# EAGLE board facetHound_inputs (EAGLE 9.6.2)
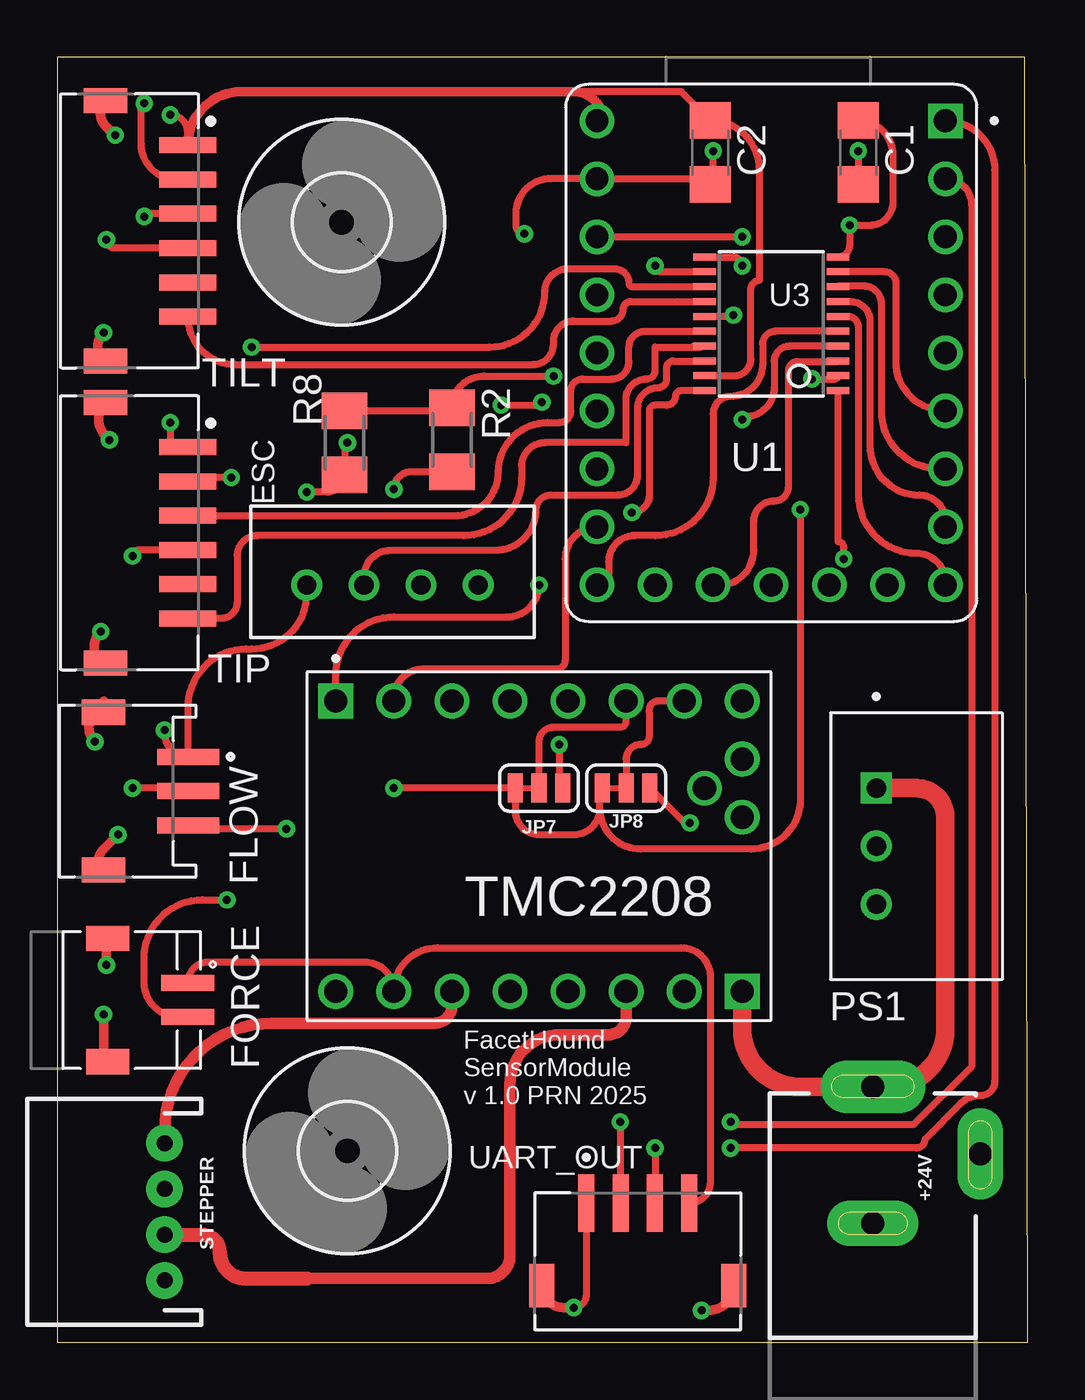
[diagram p0: board, top side]
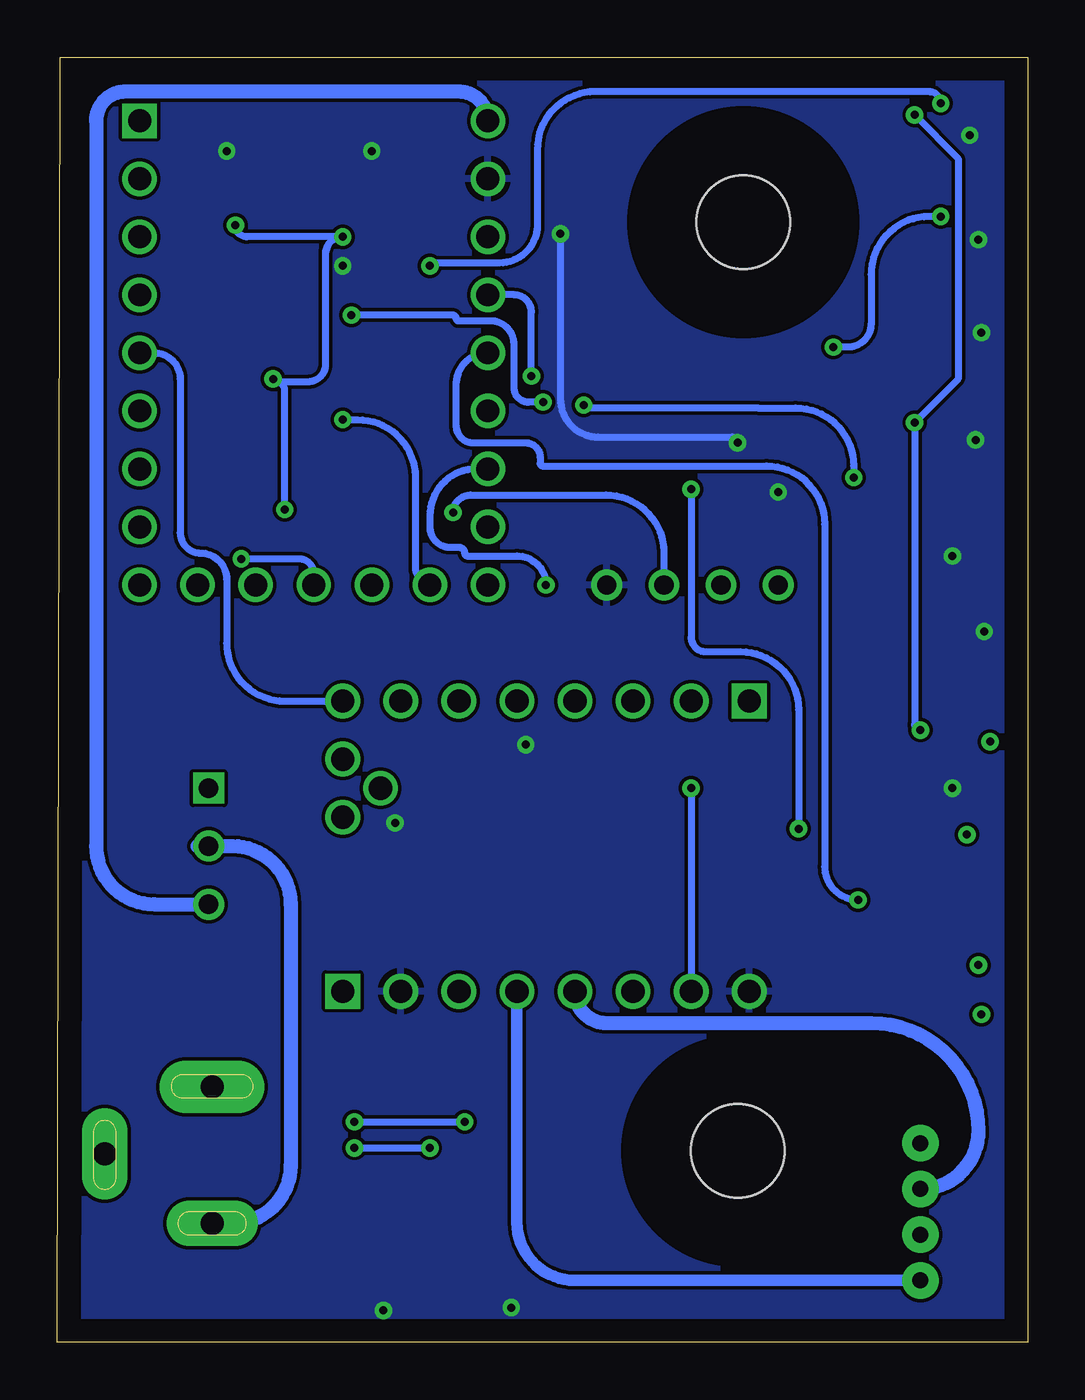
[diagram p1: board, bottom side, seen from below]

Size 42.47 x 56.25 mm. Coordinates in mm from the lower left corner, seen from the top.
Outline: 0,0 42.47,0 42.34,56.25 0,56.25 0,0
Copper layers (1*16): Top 0.035mm / dielectric 1.5mm / Bottom 0.035mm
Design rules "default": minimum track width 6mil, minimum drill 0.35mm, track to track 6mil, track to pad 6mil, pad to pad 6mil, via to via 6mil, smd to smd 6mil, copper to edge 40mil, drill to drill 6mil, minimum pad ring 10mil, minimum via ring 8mil, stop-mask expansion 4mil, vias tented up to drill 0mil, thermal gap 10mil

## Footprints (pad centres in the part's own frame; a part is rotated, then mirrored left to right if it is on the bottom)
POWER_JACK_PTH_SLOT = drill 1 pad 2 long: GND 0,0; GNDBREAK -3.048,4.699 | drill 1 pad 2.3 long: PWR -5.969,0
C1206 = smd 1.6 x 1.8: 1 -1.4,0; 2 1.4,0
B4B-XH-A = drill 0.84: 1 0,0; 2 2.5,0; 3 5,0; 4 7.5,0
JST_S3B-ZR-SM4A-TF = smd 0.7 x 2.7: 1 -1.5,3.7; 2 0,3.7; 3 1.5,3.7 | smd 1.1 x 1.9: SH1 -3.45,0; SH2 3.45,0
JST_S2B-ZR-SM4A-TF = smd 0.7 x 2.3: 1 0.75,0; 2 -0.75,0 | smd 1.1 x 1.9: P1 2.7,3.5; P2 -2.7,3.5
4,1 = hole 4.1: 0,0
SMT-JUMPER_3_1-NC_TRACE_SILK = smd 0.66 x 1.27: 1 -1.041,0; 2 0,0; 3 1.041,0
CONV_TSR_1-2450 = drill 0.85 square: 1 -2.54,-1.75 | drill 0.85: 2 0,-1.75; 3 2.54,-1.75
M1206 = smd 1.6 x 2: 1 -1.4,0; 2 1.4,0
JST-4-PTH = drill 0.7 pad 1.6: 1 -3,0; 2 -1,0; 3 1,0; 4 3,0
JST_S6B-ZR-SM4A-TF(LF)(SN) = smd 0.7 x 2.5: 1 -3.75,0; 2 -2.25,0; 3 -0.75,0; 4 0.75,0; 5 2.25,0; 6 3.75,0 | smd 1.1 x 1.9: SH1 -5.7,-3.6; SH2 5.7,-3.6
MODULE_TMC2208_SILENTSTEPSTICK = drill 1.016 square: JP1_1 6.35,8.89; JP2_1 -6.35,-8.89 | drill 1.016: JP1_2 6.35,6.35; JP1_3 6.35,3.81; JP1_4 6.35,1.27; JP1_5 6.35,-1.27; JP1_6 6.35,-3.81; JP1_7 6.35,-6.35; JP1_8 6.35,-8.89; JP2_2 -6.35,-6.35; JP2_3 -6.35,-3.81; JP2_4 -6.35,-1.27; JP2_5 -6.35,1.27; JP2_6 -6.35,3.81; JP2_7 -6.35,6.35; JP2_8 -6.35,8.89; JP3_1 1.27,-8.89; JP3_2 3.81,-8.89; VREF 2.54,-7.239
MODULE_RP2040-ZERO = drill 1 square: 1 7.62,10.16 | drill 1: 2 7.62,7.62; 3 7.62,5.08; 4 7.62,2.54; 5 7.62,0; 6 7.62,-2.54; 7 7.62,-5.08; 8 7.62,-7.62; 9 7.62,-10.16; 10 5.08,-10.16; 11 2.54,-10.16; 12 0,-10.16; 13 -2.54,-10.16; 14 -5.08,-10.16; 15 -7.62,-10.16; 16 -7.62,-7.62; 17 -7.62,-5.08; 18 -7.62,-2.54; 19 -7.62,0; 20 -7.62,2.54; 21 -7.62,5.08; 22 -7.62,7.62; 23 -7.62,10.16
TSSOP20 = smd 0.305 x 0.991: 1 -2.925,-2.918; 2 -2.275,-2.918; 3 -1.625,-2.918; 4 -0.975,-2.918; 5 -0.325,-2.918; 6 0.325,-2.918; 7 0.975,-2.918; 8 1.625,-2.918; 9 2.275,-2.918; 10 2.925,-2.918; 11 2.925,2.918; 12 2.275,2.918; 13 1.625,2.918; 14 0.975,2.918; 15 0.325,2.918; 16 -0.325,2.918; 17 -0.975,2.918; 18 -1.625,2.918; 19 -2.275,2.918; 20 -2.925,2.918
JST_S4B-ZR-SM4A-TF(LF)(SN) = smd 0.7 x 2.5: 1 -2.25,0; 2 -0.75,0; 3 0.75,0; 4 2.25,0 | smd 1.1 x 1.9: S1 -4.2,-3.6; S2 4.2,-3.6

## Placement (x,y rotation side)
+24V  POWER_JACKPOWER_JACK_SLOT  [POWER_JACK_PTH_SLOT]  35.69,5.21 270 top
C1  0.1uF  [C1206]  35.05,52.07 270 top
C2  0.1uF  [C1206]  28.57,52.07 270 top
ESC  B4B-XH-A  [B4B-XH-A]  10.92,33.15 0 top
FLOW  S3B-ZR-SM4A-TF  [JST_S3B-ZR-SM4A-TF]  2.03,24.13 270 top
FORCE  S2B-ZR-SM4A-TF  [JST_S2B-ZR-SM4A-TF]  5.71,14.99 90 top
H1  MOUNT-HOLE4.1  [4,1]  12.45,49.02 0 top
H2  MOUNT-HOLE4.1  [4,1]  12.7,8.38 0 top
JP7  JUMPER-SMT_3_1-NC_TRACE_SILK  [SMT-JUMPER_3_1-NC_TRACE_SILK]  21.08,24.26 180 top
JP8  JUMPER-SMT_3_1-NC_TRACE_SILK  [SMT-JUMPER_3_1-NC_TRACE_SILK]  24.89,24.26 180 top
PS1  TSR_1-2450  [CONV_TSR_1-2450]  37.59,21.72 270 top
R2  10k  [M1206]  17.27,39.5 90 top
R8  10k  [M1206]  12.57,39.37 90 top
STEPPER  [JST-4-PTH]  4.7,5.71 90 top
TILT  S6B-ZR-SM4A-TF(LF)(SN)  [JST_S6B-ZR-SM4A-TF(LF)(SN)]  5.71,48.64 270 top
TIP  S6B-ZR-SM4A-TF(LF)(SN)  [JST_S6B-ZR-SM4A-TF(LF)(SN)]  5.71,35.43 270 top
TMC2208  TMC2208_SILENTSTEPSTICK  [MODULE_TMC2208_SILENTSTEPSTICK]  21.08,21.72 90 top
U1  RP2040-ZERO'  [MODULE_RP2040-ZERO]  31.24,43.31 0 top
U3  [TSSOP20]  31.24,44.58 90 top
UART_OUT  S4B-ZR-SM4A-TF(LF)(SN)  [JST_S4B-ZR-SM4A-TF(LF)(SN)]  25.4,6.1 0 top

## Library data of the parts
+24V = SparkFun-Connectors; PROD_ID: CONN-08197
C1 C2 R2 R8 U3 = adafruit
ESC = Connector; CATEGORY: Header; DATASHEET: https://www.jst-mfg.com/product/pdf/eng/eXH.pdf?67404de0bbae1; DESCRIPTION: Connector Header Through Hole 4 position 0.098" (2.50mm); MANUFACTURER: JST Sales America Inc.; MPN: B4B-XH-A; OPERATING_TEMPERATURE: -25°C ~ 85°C; PACKAGE_SIZE: NA; PACKAGE_TYPE: THT; PART_STATUS: ACTIVE; PITCH: 0.098" (2.50mm); ROHS: COMPLIANT; SERIES: XH; SUBCATEGORY: Rectangular Connectors; TYPE: Header-Male Pin-Board to Cable/Wire-Through Hole
FLOW = S3B-ZR-SM4A-TF; AVAILABILITY: In Stock; CHECK_PRICES: https://www.snapeda.com/parts/S3B-ZR-SM4A-TF/JST/view-part/?ref=eda; DESCRIPTION: Connector Header Surface Mount, Right Angle 3 position 0.059 (1.50mm); MF: JST Sales; MP: S3B-ZR-SM4A-TF; PACKAGE: None; PRICE: None; SNAPEDA_LINK: https://www.snapeda.com/parts/S3B-ZR-SM4A-TF/JST/view-part/?ref=snap
FORCE = S2B-ZR-SM4A-TF; AVAILABILITY: In Stock; CHECK_PRICES: https://www.snapeda.com/parts/S2B-ZR-SM4A-TF/JST/view-part/?ref=eda; DESCRIPTION: Connector Header Surface Mount, Right Angle 2 position 0.059 (1.50mm); MF: JST Sales; MP: S2B-ZR-SM4A-TF; PACKAGE: None; PRICE: None; SNAPEDA_LINK: https://www.snapeda.com/parts/S2B-ZR-SM4A-TF/JST/view-part/?ref=snap
H1 H2 = holes
JP7 JP8 = SparkFun-Jumpers
PS1 = TSR_1-2450; MANUFACTURER: Traco Power; MAXIMUM_PACKAGE_HEIGHT: 10.6mm; PARTREV: Apr 27, 2020; STANDARD: Manufacturer Recommendations
STEPPER = SparkFun-Connectors; PROD_ID: WIRE-13531; SF_ID: PRT-09916
TILT TIP = S6B-ZR-SM4A-TF_LF__SN_; AVAILABILITY: In Stock; CHECK_PRICES: https://www.snapeda.com/parts/S6B-ZR-SM4A-TF(LF)(SN)/JST/view-part/?ref=eda; DESCRIPTION: Connector Header Surface Mount, Right Angle 6 position 0.059 (1.50mm); MF: JST Sales America Inc.; MP: S6B-ZR-SM4A-TF(LF)(SN); PACKAGE: None; PRICE: None; SNAPEDA_LINK: https://www.snapeda.com/parts/S6B-ZR-SM4A-TF(LF)(SN)/JST/view-part/?ref=snap
TMC2208 = TMC2208_SILENTSTEPSTICK; AVAILABILITY: In Stock; CHECK_PRICES: https://www.snapeda.com/parts/TMC2208%20SILENTSTEPSTICK/Trinamic/view-part/?ref=eda; DESCRIPTION: TMC2208 Motor Controller/Driver, Stepper Power Management Evaluation Board; MF: Trinamic Motion; MP: TMC2208 SILENTSTEPSTICK; PACKAGE: None; PRICE: None; SNAPEDA_LINK: https://www.snapeda.com/parts/TMC2208%20SILENTSTEPSTICK/Trinamic/view-part/?ref=snap
U1 = RP2040-ZERO; AVAILABILITY: Not in stock; CHECK_PRICES: https://www.snapeda.com/parts/RP2040-ZERO/Waveshare+Electronics/view-part/?ref=eda; DESCRIPTION: Low-Cost, High-Performance Pico-Like MCU Board Based On Raspberry Pi Microcontroller RP2040; MF: Waveshare Electronics; MP: RP2040-ZERO; PACKAGE: Package; PRICE: None; SNAPEDA_LINK: https://www.snapeda.com/parts/RP2040-ZERO/Waveshare+Electronics/view-part/?ref=snap
UART_OUT = S4B-ZR-SM4A-TF_LF__SN_; AVAILABILITY: In Stock; CHECK_PRICES: https://www.snapeda.com/parts/S4B-ZR-SM4A-TF(LF)(SN)/JST/view-part/?ref=eda; DESCRIPTION: Connector Header Surface Mount, Right Angle 4 position 0.059 (1.50mm); MF: JST Sales; MP: S4B-ZR-SM4A-TF(LF)(SN); PACKAGE: None; PRICE: None; SNAPEDA_LINK: https://www.snapeda.com/parts/S4B-ZR-SM4A-TF(LF)(SN)/JST/view-part/?ref=snap

## Nets
GND: C1.2 C2.2 ESC.4 FLOW.2 JP7.1 JP8.1 R8.1 TILT.4 TILT.SH1 TILT.SH2 TIP.4 TIP.SH1 TIP.SH2 TMC2208.JP2_2 TMC2208.JP2_8 U1.22 U3.11 UART_OUT.1 UART_OUT.S1 UART_OUT.S2
N$1: R2.2 R8.2 U1.20
N$2: FORCE.2 U1.19
N$3: U1.2 UART_OUT.2
N$4: U1.1 UART_OUT.3
N$5: STEPPER.4 TMC2208.JP2_6
N$6: TMC2208.JP1_2 U1.16
N$7: C2.1 ESC.1 FLOW.1 PS1.3 TILT.1 TIP.1 U1.23 U3.19
N$8: +24V.PWR PS1.1 TMC2208.JP2_1
N$9: +24V.GND PS1.2
N$10: STEPPER.3 TMC2208.JP2_5
N$11: TMC2208.JP1_1 U1.17
N$13: TMC2208.JP1_8 U1.5
N$14: STEPPER.2 TMC2208.JP2_3
N$15: C1.1 FORCE.1 JP7.3 JP8.3 TMC2208.JP2_7 U1.21 U3.2 U3.10 UART_OUT.4
N$16: JP7.2 TMC2208.JP1_6
N$17: FLOW.3 R2.1
N$18: JP8.2 TMC2208.JP1_7
N$20: STEPPER.1 TMC2208.JP2_4
N$21: ESC.3 U3.20
N$22: ESC.2 U3.18
N$23: TIP.6 U3.17
N$24: TIP.3 U3.16
N$25: TIP.2 U3.15
N$26: TILT.6 U3.14
N$27: TILT.3 U3.13
N$28: TILT.2 U3.12
N$29: U1.12 U3.1
N$31: U1.13 U3.3
N$32: U1.14 U3.4
N$33: U1.15 U3.5
N$34: U1.6 U3.9
N$35: U1.7 U3.8
N$36: U1.8 U3.7
N$37: U1.9 U3.6

## Tracks (layer width: path | path; a pad name or v marks a point on that pad's centre or on a via)
GND  (via drill 0.35)
  Top 0.305: v28.7,52.14 28.7,50.8 arc-90 C2.2 28.32,50.93 U1.22 21.59,50.93 arc90 20.07,49.4 20.07,48.89 arc90 v20.45,48.51 | v35.05,52.14 C1.2 | v21.97,26.16 21.97,24.41 JP7.1 | v27.69,22.73 27.46,22.73 JP8.1 | UART_OUT.1 23.15,2.07 arc-90 v22.61,1.52 | v12.7,39.37 arc90 12.57,39.24 R8.1 arc-90 11.81,37.21 v10.92,37.21 | FLOW.2 arc90 5.61,24.26 v3.3,24.26 | TIP.4 3.57,34.68 arc90 v3.3,34.42 | TILT.4 2.53,47.89 arc-90 v2.16,48.26 | U3.11 29.59,47.5 arc-90 v29.97,47.12
  Top 0.406: TIP.SH2 1.9,29.73 arc-90 v1.9,31.11 | v2.29,39.5 2.12,39.67 arc-90 TIP.SH1 | TILT.SH2 2.03,42.94 arc-90 v2.03,44.2 | v2.54,52.83 2.12,53.26 arc-90 TILT.SH1 | UART_OUT.S1 arc90 22.17,1.52 v22.61,1.52 | UART_OUT.S2 arc-90 28.5,1.4 v28.19,1.4
  Bottom 0.305: v20.45,48.51 20.45,41.27 arc-90 18.8,39.62 12.95,39.62 arc90 v12.7,39.37
  pour Bottom: 0.76,56.01 41.4,56.01 41.4,0.13 0.76,0.13
N$1  (via drill 0.35)
  Top 0.305: R8.2 17.14,40.77 arc90 R2.2 arc-90 18.67,42.29 v21.72,42.29
  Bottom 0.305: v21.72,42.29 21.72,45.08 arc-90 22.48,45.85 U1.20
N$2  (via drill 0.35)
  Top 0.305: FORCE.2 5.32,14.24 arc-90 3.81,15.75 3.81,16.83 arc-90 6.35,19.37 v7.43,19.37
  Bottom 0.305: U1.19 arc-90 25.02,41.91 25.02,40.13 arc-90 24.26,39.37 21.97,39.37 arc90 21.34,38.73 21.34,38.48 arc-90 21.21,38.35 11.43,38.35 arc90 8.89,35.81 8.89,20.83 arc-90 v7.43,19.37
N$3  (via drill 0.35)
  Top 0.305: U1.2 arc-90 40,49.78 40,12.07 37.46,9.53 29.59,9.53 arc-90 v29.46,9.65 | v24.64,9.65 24.64,6.11 arc90 UART_OUT.2
  Bottom 0.305: v29.46,9.65 v24.64,9.65
N$4  (via drill 0.35)
  Top 0.305: UART_OUT.3 arc90 26.16,6.11 v26.16,8.51 | U1.1 arc-90 41.02,51.31 41.02,11.43 arc-90 40.39,10.79 arc45 39.52,10.44 37.97,8.89 arc-90 37.59,8.51 v29.46,8.51
  Bottom 0.305: U1.1 38.35,53.47 | v29.46,8.51 v26.16,8.51
N$5
  Top 0.508: STEPPER.4 4.7,9.27 arc-90 9.4,13.97 16.51,13.97 arc90 17.27,14.73 TMC2208.JP2_6
N$6
  Top 0.305: TMC2208.JP1_2 14.73,28.19 | 14.73,28.19 14.73,28.57 | U1.16 arc90 22.23,34.29 22.23,29.85 arc-90 21.84,29.46 16,29.46 arc90 14.73,28.19
N$7  (via drill 0.35)
  Top 0.305: U1.23 arc-90 U1.23 23.88,53.47 | 8.06,54.74 27.31,54.74 C2.1 arc-90 30.73,51.31 30.73,46.48 arc90 30.35,46.1 30.35,43.05 arc-90 29.6,42.3 U3.19 | ESC.1 10.92,32.77 arc-90 8.51,30.35 8.27,30.35 arc90 5.73,27.81 FLOW.1 arc-90 4.7,26.66 v4.7,26.8 | TILT.1 5.71,52.96 arc90 v4.95,53.72 | v4.95,40.26 4.95,39.5 | 4.95,39.5 4.95,39.37 arc90 5.21,39.12 | TIP.1 5.27,39.18 arc-90 4.95,39.5
  Top 0.406: TILT.1 arc-90 8.06,54.74 22.61,54.74 arc-90 23.88,53.47
  Bottom 0.305: v4.95,53.72 3.05,51.82 3.05,42.16 v4.95,40.26 4.95,27.05 arc-90 v4.7,26.8
  Bottom 0.61: U1.23 arc-90 24.89,54.74 39.5,54.74 arc-90 40.77,53.47 40.77,21.72 arc-90 38.23,19.18 PS1.3
N$8
  Top 0.813: TMC2208.JP2_1 29.97,13.72 arc90 32.51,11.18 +24V.PWR 36.32,11.18 arc90 38.86,13.72 38.86,22.99 arc90 37.59,24.26 PS1.1
N$9
  Bottom 0.61: 36.32,21.72 PS1.2 34.8,21.72 arc90 32.26,19.18 32.26,7.75 arc90 34.8,5.21 +24V.GND 36.32,5.21
N$10
  Bottom 0.508: 9.27,13.97 9.78,13.97
  Bottom 0.61: STEPPER.3 arc-90 2.15,9.26 arc-90 6.86,13.97 9.78,13.97 18.41,13.97 arc90 TMC2208.JP2_5
N$11  (via drill 0.35)
  Top 0.305: TMC2208.JP1_1 12.19,29.21 arc-90 14.73,31.75 19.69,31.75 arc90 v21.08,33.15
  Bottom 0.305: U1.17 24.13,38.23 arc-90 26.16,36.19 26.16,35.69 arc-90 25.27,34.8 24.89,34.8 arc90 24.64,34.54 arc-90 24.51,34.42 22.35,34.42 arc90 v21.08,33.15
N$13
  Bottom 0.305: U1.5 38.23,43.31 arc90 37.08,42.16 37.08,35.43 arc-90 36.2,34.54 arc90 35.05,33.4 35.05,30.61 arc-90 32.51,28.07 TMC2208.JP1_8
N$14
  Top 0.508: 10.67,2.79 10.92,2.79 18.8,2.79 arc90 19.81,3.81 19.81,11.3 arc-90 21.97,13.46 24.13,13.46 arc90 24.89,14.22 TMC2208.JP2_3
  Top 0.61: STEPPER.2 6.33,4.71 arc-90 7.11,3.94 arc90 8.25,2.79 10.92,2.79
N$15  (via drill 0.35)
  Top 0.305: 23.75,23.37 arc-90 22.61,22.22 21.08,22.22 arc-90 20.04,23.27 JP7.3 v14.73,24.26 | 23.75,23.37 23.75,24.15 arc-90 JP8.3 23.85,24.03 | C1.1 arc90 C1.1 arc-90 36.58,51.95 36.58,49.91 arc-90 35.56,48.89 v34.67,48.89 34.67,48.01 arc-90 U3.10 | UART_OUT.4 arc90 28.57,7.02 28.57,16 arc90 27.3,17.27 16.64,17.27 arc90 TMC2208.JP2_7 arc90 13.46,16.64 6.62,16.64 arc90 FORCE.1 | U1.21 v29.97,48.39 | v33.02,42.16 34.02,42.16 arc90 U3.2 | v32.51,36.45 32.51,23.75 arc-90 30.35,21.59 25.53,21.59 arc-90 23.75,23.37
  Bottom 0.305: v14.73,24.26 TMC2208.JP2_7 | v34.67,48.89 arc-90 34.16,48.39 v29.97,48.39 arc-90 30.73,47.62 30.73,42.8 arc90 31.5,42.04 32.89,42.04 | 32.89,42.04 arc90 v33.02,42.16 | v32.51,36.45 32.51,41.66 arc-90 32.89,42.04
N$16
  Top 0.305: 24.77,27.94 arc-90 TMC2208.JP1_6 24.89,27.18 arc-90 24.64,26.92 21.72,26.92 arc90 21.08,26.29 JP7.2
N$17  (via drill 0.35)
  Top 0.305: R2.1 15.49,38.1 arc90 v14.73,37.34 | v10.03,22.48 5.88,22.48 arc-90 FLOW.3
  Bottom 0.305: v14.73,37.34 14.73,30.86 arc-90 14.1,30.23 12.57,30.23 arc90 10.03,27.69 v10.03,22.48
N$18
  Top 0.305: TMC2208.JP1_7 26.29,28.07 arc90 25.91,27.69 25.91,27.56 25.91,26.54 arc-90 25.53,26.16 arc90 24.89,25.53 JP8.2
N$19  (via drill 0.35)
  Top 0.406: v1.65,26.29 arc-90 1.65,27.56 2.03,27.56 2.03,28.07
N$20
  Bottom 0.508: STEPPER.1 19.81,2.71 arc90 22.35,5.25 TMC2208.JP2_4
N$21  (via drill 0.35)
  Top 0.305: U3.20 27.3,41.65 arc90 27.05,41.4 arc-90 26.67,41.02 26.16,41.02 arc90 25.91,40.77 25.91,37.08 arc-90 v25.15,36.32
  Bottom 0.305: v25.15,36.32 arc90 24.38,37.08 18.46,37.08 arc90 15.92,34.54 ESC.3
N$22
  Top 0.305: ESC.2 13.42,33.49 arc-90 14.61,34.67 19.18,34.67 arc90 20.96,36.45 arc-90 21.59,37.08 24.51,37.08 arc90 25.4,37.97 25.4,40.89 arc-90 26.29,41.78 arc90 26.67,42.16 26.67,42.67 arc-90 26.95,42.95 U3.18
N$23
  Top 0.305: U3.17 28.19,43.6 | 28.19,43.6 27.81,43.6 | TIP.6 7.17,31.68 arc90 7.87,32.39 7.87,34.42 arc-90 8.76,35.31 17.78,35.31 arc90 20.32,37.85 20.32,38.35 arc-90 21.34,39.37 24.89,39.37 24.89,41.27 arc-90 25.78,42.16 arc90 26.16,42.55 26.16,43.56 28.15,43.56 arc90 28.19,43.6
N$24
  Top 0.305: U3.16 27.12,44.25 25.71,44.25 arc90 25.02,43.56 25.02,42.93 arc-90 24.26,42.16 22.99,42.16 arc90 22.48,41.66 22.48,40.77 arc-90 21.97,40.26 21.46,40.26 arc90 19.3,38.1 arc-90 17.39,36.18 TIP.3
N$25  (via drill 0.35)
  Top 0.305: v29.59,44.96 arc-90 29.54,44.9 U3.15 | v19.43,41.02 21.08,41.02 arc90 v21.21,41.15 | v7.62,37.85 5.88,37.85 arc90 TIP.2
  Bottom 0.305: v19.43,41.02 arc-90 19.3,40.89 13.46,40.89 11.81,40.89 10.16,40.89 arc90 7.62,38.35 v7.62,37.85 | v21.21,41.15 21.84,41.15 arc90 22.48,41.78 22.48,43.69 arc-90 23.5,44.7 24.89,44.7 arc90 25.02,44.83 arc-90 25.15,44.96 v29.59,44.96
N$26
  Top 0.305: U3.14 27.14,45.55 25.11,45.55 arc90 24.77,45.21 arc-90 24.26,44.7 22.61,44.7 arc90 21.72,43.81 21.72,43.69 arc-90 20.83,42.8 7.81,42.8 arc-90 TILT.6
N$27  (via drill 0.35)
  Top 0.305: U3.13 25.17,46.2 arc-90 25.02,46.35 arc90 24.38,46.99 22.35,46.99 arc90 21.34,45.97 arc-90 18.92,43.56 v8.51,43.56 | TILT.3 3.92,49.39 arc90 v3.81,49.28
  Bottom 0.305: v3.81,49.28 4.32,49.28 arc-90 6.86,46.74 6.86,44.58 arc90 7.87,43.56 v8.51,43.56
N$28  (via drill 0.35)
  Top 0.305: TILT.2 5.24,50.89 arc-90 3.68,52.45 3.68,54.1 arc-90 v3.81,54.23 | v26.16,47.12 arc90 26.43,46.85 U3.12
  Bottom 0.305: v3.81,54.23 arc-90 4.32,54.74 18.92,54.74 arc-90 21.46,52.2 21.46,48.89 arc90 23.11,47.24 26.04,47.24 arc-90 v26.16,47.12
N$29  (via drill 0.35)
  Top 0.305: U3.1 34.16,35.05 arc-90 34.42,34.79 v34.42,34.29
  Bottom 0.305: U1.12 31.24,33.66 arc-90 31.88,34.29 v34.42,34.29
N$31
  Top 0.305: 28.7,33.78 U1.13 28.96,33.15 arc90 30.48,34.67 30.48,35.94 arc-90 31.37,36.83 arc90 32,37.47 32,42.55 arc-90 32.38,42.93 34.13,42.93 arc90 U3.3
N$32  (via drill 0.35)
  Top 0.305: U3.4 32.04,43.6 arc90 31.37,42.93 31.37,41.78 arc-90 30.1,40.51 arc90 v29.97,40.39
  Bottom 0.305: 26.16,33.66 26.16,33.27 | 26.16,33.27 U1.14 | v29.97,40.39 29.34,40.39 arc90 26.8,37.85 26.8,33.91 arc-90 26.16,33.27
N$33
  Top 0.305: U1.15 arc90 24.13,33.66 24.13,34.16 arc-90 25.27,35.31 26.16,35.31 arc90 28.7,37.85 28.7,40.64 arc-90 29.46,41.4 arc90 30.86,42.8 30.86,43.69 arc-90 31.43,44.25 U3.5
N$34
  Top 0.305: U1.6 arc-90 36.7,42.93 36.7,46.35 arc90 36.21,46.85 U3.9
N$35
  Top 0.305: U1.7 38.61,38.23 arc-90 36.07,40.77 36.07,45.47 arc90 35.31,46.23 34.19,46.23 arc90 U3.8
N$36
  Top 0.305: U3.7 34.71,45.55 arc-90 35.56,44.7 35.56,39.24 arc90 37.72,37.08 arc-90 38.86,35.94 U1.8
N$37
  Top 0.305: U3.6 34.6,44.9 arc-90 35.05,44.45 35.05,37.08 arc90 37.59,34.54 arc-90 38.86,33.27 U1.9
N$38  (via drill 0.35)
  Top 0.406: v2.67,22.22 2.03,21.59 arc90 2.03,20.45
N$39  (via drill 0.35)
  Top 0.406: v2.16,16.51 2.16,18.03 2.03,17.91
N$40  (via drill 0.35)
  Top 0.406: v2.03,14.35 2.03,12.83

## Text on the board
tNames: FacetHound / SensorModule / v 1.0 PRN 2025
tValues: 10k